# Altium PCB POWR0009.PcbDoc
Units mm, origin at the board's own origin, x right, y up, seen from the top; angles counter-clockwise.
Board outline 50 x 50 mm, 2 copper layers (Top Layer, Bottom Layer); 67 components, 40 nets, 223 pads, 95 vias.
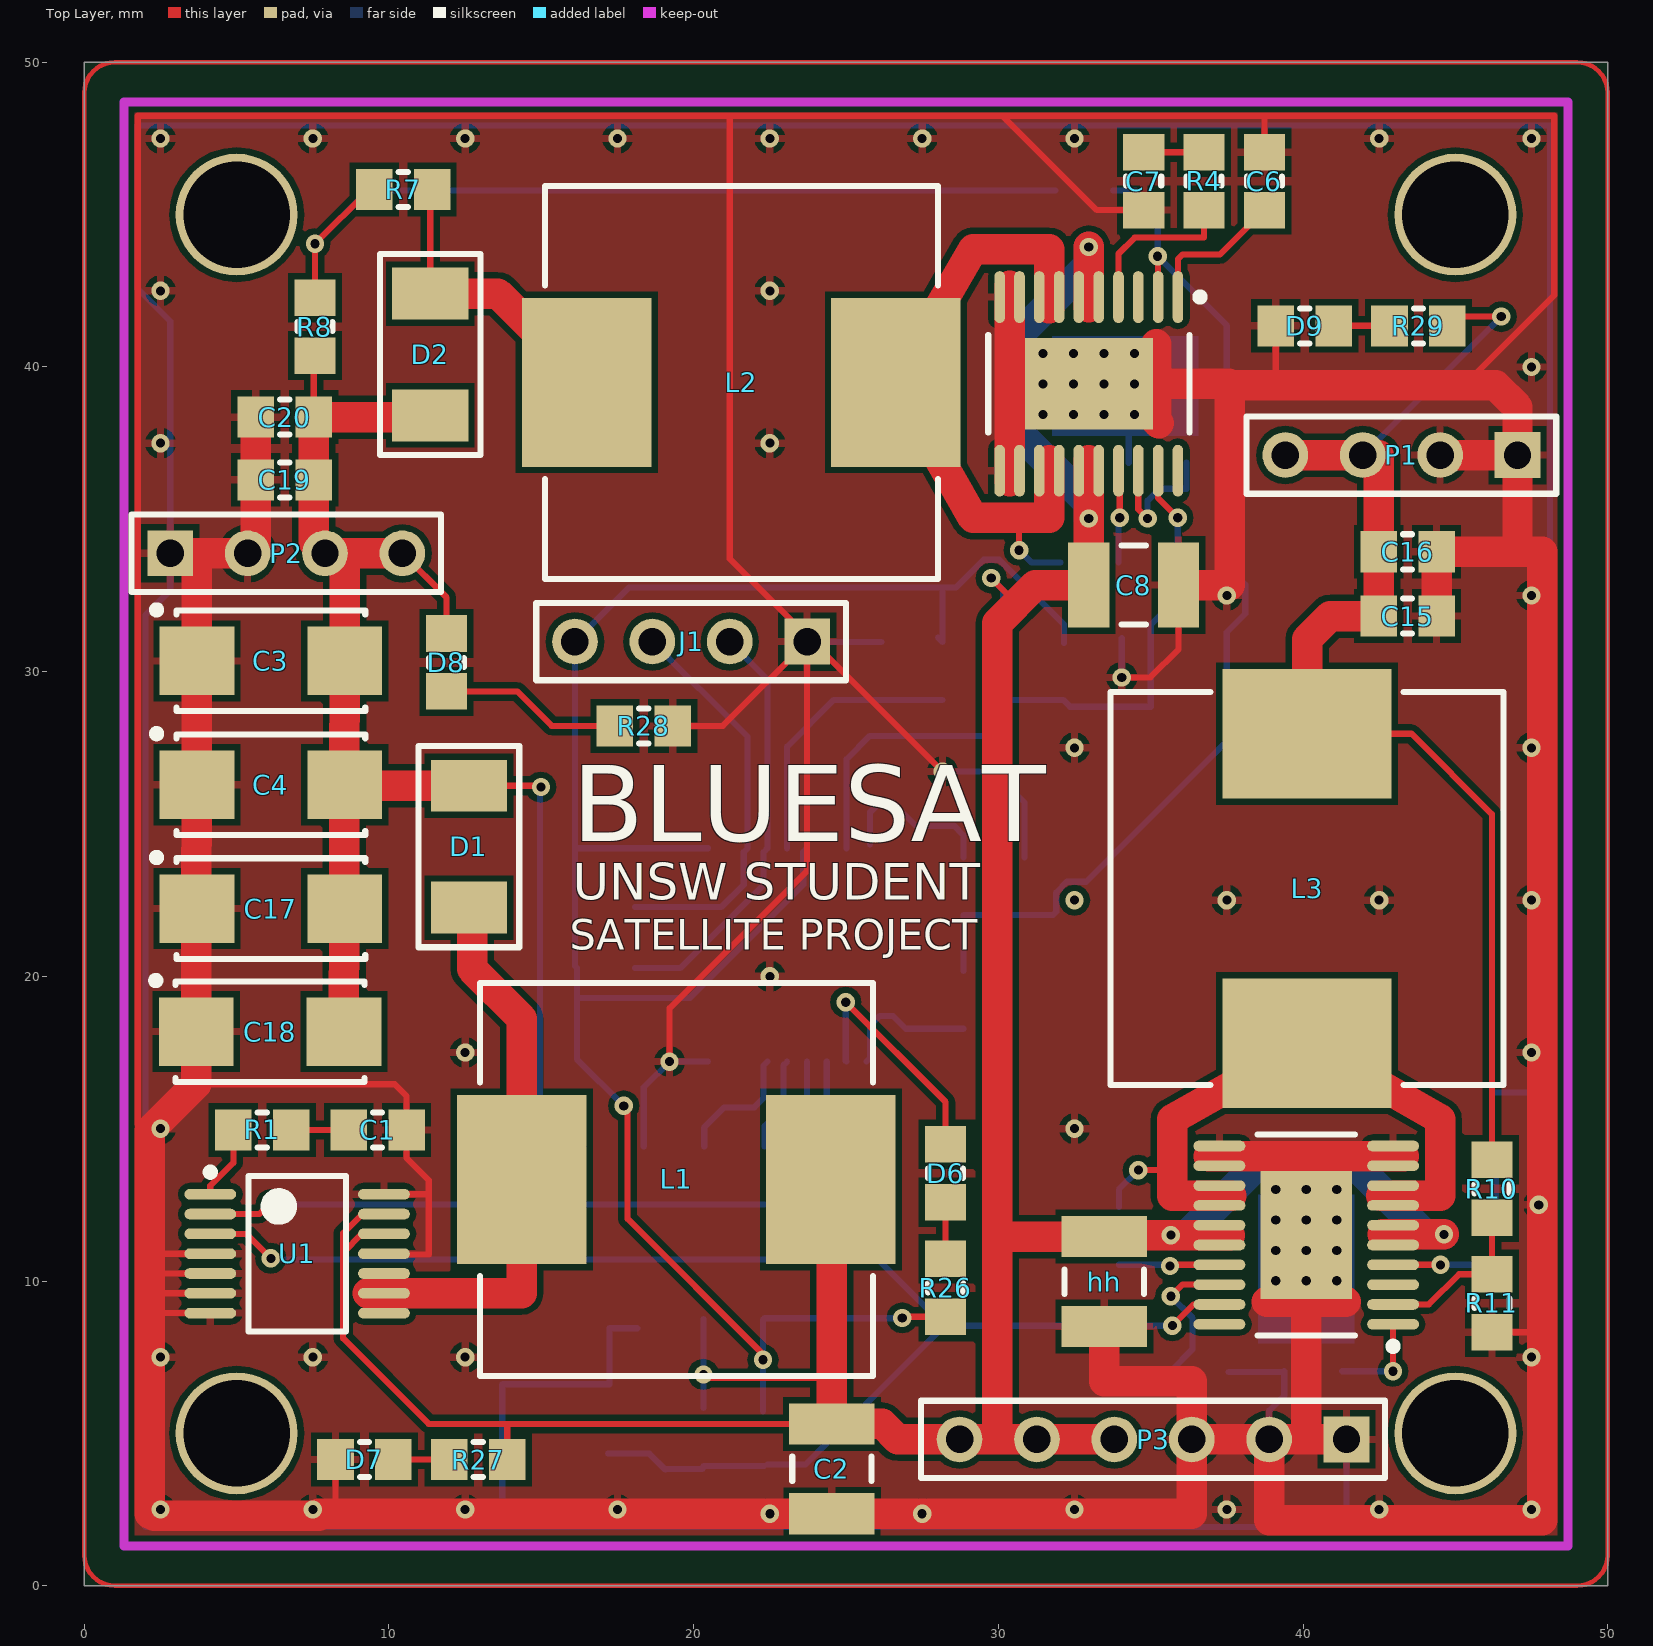
[diagram p0: Top Layer view]
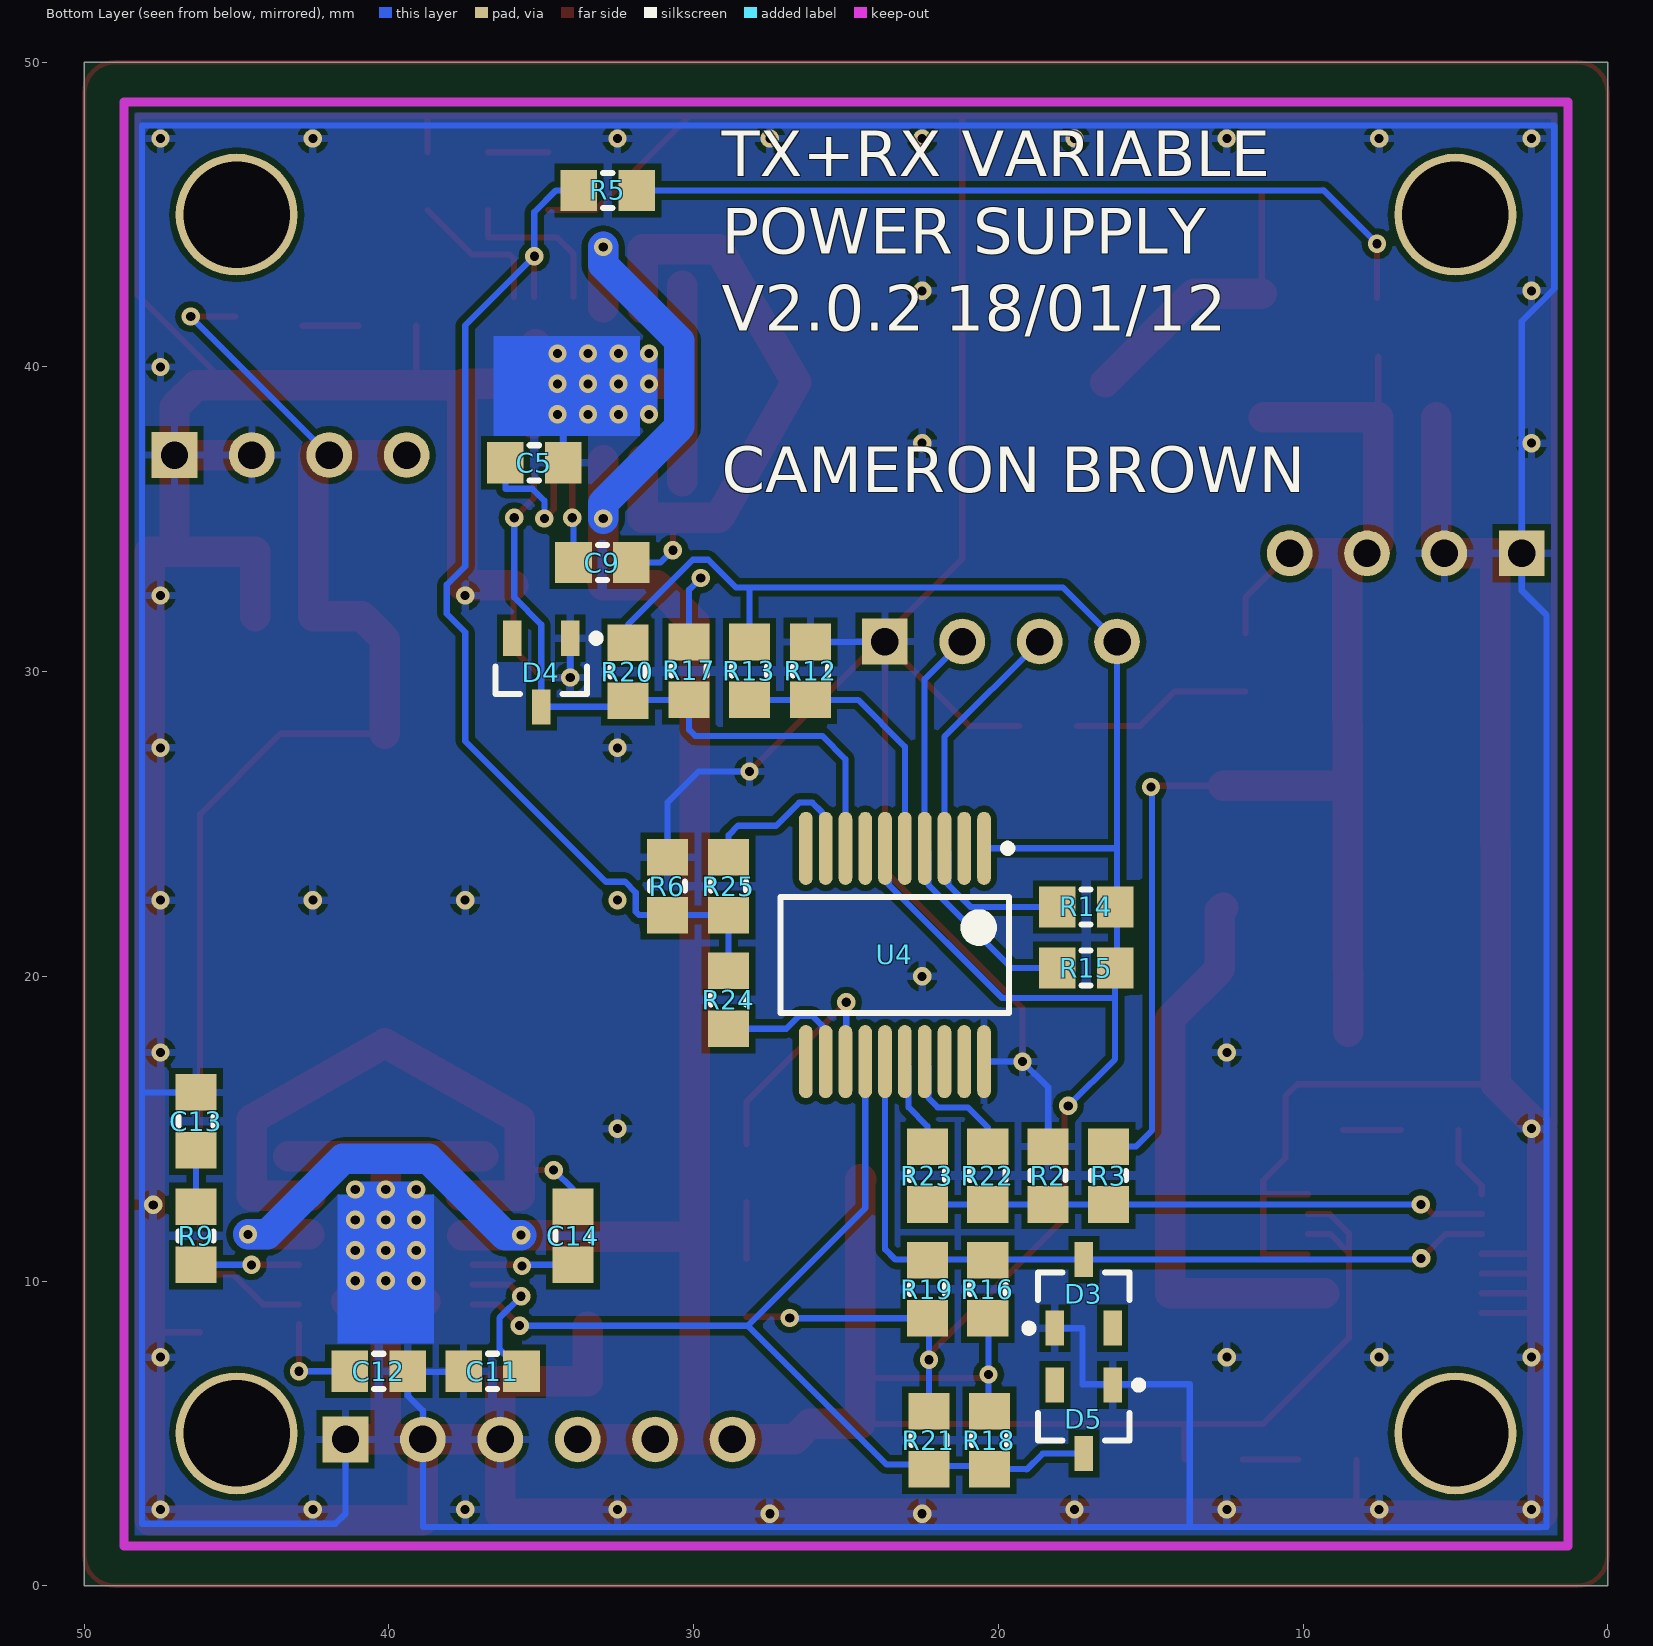
[diagram p1: Bottom Layer view, seen from below]

## Layer stack, top to bottom
Top Layer: signal copper 0.0356
Dielectric: dielectric 0.32, FR-4, Dk 4.8
Bottom Layer: signal copper 0.0356

## Board outline
0,0 50,0 50,50 0,50

## Design rules (kind name [scope] priority, off if disabled: settings)
Clearance [All] p1: gap=0.2
HoleSize [All] p1: absolutevalues=TRUE maxlimit=6.3 minlimit=0.025 maxpercent=80.000 minpercent=20.000
MinimumSolderMaskSliver [All] p1: minsoldermaskwidth=0.1
PolygonConnect [All] p1: connectstyle=Relief reliefconductorwidth=0.254 reliefentries=4 polygonreliefangle="90 Angle"
RoutingVias [All] p1: holewidth=0.3 width=0.6 viastyle="Through Hole" minholewidth=0.3 minwidth=0.6 maxholewidth=0.3 maxwidth=0.6
SilkscreenOverComponentPads [All] p1: minsilkscreentomaskgap=0.254
SolderMaskExpansion [All] p1: expansion=0.102
Width [All] p1: maxlimit=1 minlimit=0.152 preferedwidth=0.203
25 further rules are at their usual default settings.

## Components (designator, comment, footprint, x,y, rotation, side; value= is the part's Value field where it differs from the comment)
C1 "Cap" R0805M 9.627,14.961 r180 top
C2 "C3225X7R1C226M" R1210M 24.536,3.835 r90 top
C3 "TAJC476K020RNJ" TANTCASEC 6.121,30.353 r0 top
C4 "Cap" TANTCASEC 6.121,26.289 r0 top
C5 "Cap" R0805M 35.23,36.855 r0 bottom
C6 "Cap" R0805M 38.735,46.101 r270 top
C7 "Cap" R0805M 34.773,46.101 r90 top
C8 "Cap" R1210M 34.442,32.842 r180 top
C9 "Cap" R0805M 32.995,33.579 r0 bottom
C11 "Cap" R0805M 36.601,7.036 r180 bottom
C12 "Cap" R0805M 40.335,7.036 r0 bottom
C13 "Cap" R0805M 46.33,15.24 r270 bottom
C14 "Cap" R0805M 33.96,11.481 r90 bottom
C15 "Cap" R0805M 43.434,31.826 r180 top
C16 "Cap" R0805M 43.434,33.934 r180 top
C17 "Cap" TANTCASEC 6.121,22.225 r0 top
C18 "Cap" TANTCASEC 6.096,18.186 r0 top
C19 "Cap" R0805M 6.579,36.297 r0 top
C20 "Cap" R0805M 6.579,38.354 r0 top
D1 "B220A-13-F" DIODESMA 12.624,24.257 r90 top
D2 "B220A-13-F" DIODESMA 11.354,40.411 r270 top
D3 "MMBZ5231BLT1G" SOT95P240-3N 17.196,9.576 r90 bottom
D4 "MMBZ5231BLT1G" SOT95P240-3N 35.001,29.972 r270 bottom
D5 "MMBZ5231BLT1G" SOT95P240-3N 17.196,5.461 r270 bottom
D6 "LED2" R0805M 28.27,13.538 r90 top
D7 "LED2" R0805M 9.195,4.14 r180 top
D8 "LED2" R0805M 11.887,30.302 r270 top
D9 "LED2" R0805M 40.056,41.351 r180 top
hh "Cap" R1210M 33.477,9.982 r90 top (schematic designator C10)
J1 "Header 4" HDR1X4 23.724,30.988 r180 top
L1 "SRR1260-100M" SRR1260M 19.431,13.335 r180 top
L2 "SRR1260-150M" SRR1260M 21.565,39.497 r180 top
L3 "SRR1260-150M" SRR1260M 40.132,22.885 r90 top
P1 "Header 4" HDR1X4 47.041,37.109 r180 top
P2 "Header 4" HDR1X4 2.819,33.884 r0 top
P3 "Header 6" HDR1X6 41.427,4.801 r180 top
R1 "Res2" R0805M 5.842,14.961 r180 top
R2 "Res2" R0805M 18.364,13.462 r270 bottom
R3 "Res2" R0805M 16.383,13.462 r90 bottom
R4 "Res2" R0805M 36.754,46.101 r90 top
R5 "Res2" R0805M 32.817,45.796 r0 bottom
R6 "Res2" R0805M 30.861,22.962 r90 bottom
R7 "Res2" R0805M 10.465,45.822 r180 top
R8 "Res2" R0805M 7.569,41.326 r90 top
R9 "Res2" R0805M 46.33,11.481 r90 bottom
R10 "Res2" R0805M 46.203,13.03 r90 top
R11 "Res2" R0805M 46.203,9.271 r90 top
R12 "Res2" R0805M 26.162,30.023 r270 bottom
R13 "Res2" R0805M 28.169,30.023 r90 bottom
R14 "Res2" R0805M 17.12,22.276 r180 bottom
R15 "Res2" R0805M 17.12,20.269 r180 bottom
R16 "Res2" R0805M 20.345,9.728 r270 bottom
R17 "Res2" R0805M 30.15,30.023 r90 bottom
R18 "Res2" R0805M 20.295,4.775 r90 bottom
R19 "Res2" R0805M 22.327,9.728 r270 bottom
R20 "Res2" R0805M 32.156,29.997 r90 bottom
R21 "Res2" R0805M 22.276,4.775 r90 bottom
R22 "Res2" R0805M 20.345,13.462 r270 bottom
R23 "Res2" R0805M 22.327,13.462 r270 bottom
R24 "Res2" R0805M 28.854,19.228 r90 bottom
R25 "Res2" R0805M 28.854,22.962 r270 bottom
R26 "Res2" R0805M 28.27,9.779 r270 top
R27 "Res2" R0805M 12.929,4.14 r0 top
R28 "Res2" R0805M 18.364,28.219 r180 top
R29 "Res2" R0805M 43.79,41.351 r0 top
U1 "LM2700MT-ADJ" MTC14_N 6.985,10.897 r0 top
U4 "MCP23009SS" SSOP-SS20_M 23.393,20.701 r270 bottom

## Footprints (in the part's own frame and the unit in brackets; to place one, negate y for a bottom-side part, rotate by r counter-clockwise, add the part's x,y. Pads: shape width x height; smd on the part's side, far side on the other; paste and mask are expansions set on the pad)
DIODESMA [mm]
  rect 1.7x2.5 smd: 1(-2,0) 2(2,0)
  silkscreen extent -3.3,-1.65 3.3,1.65
HDR1X4 [mm] "Connector; Header; 4 Position"
  rect 1.5x1.5 hole 0.9: 1(0,0)
  round 1.5 hole 0.9: 2(2.54,0) 3(5.08,0) 4(7.62,0)
  silkscreen extent -1.27,-1.27 8.89,1.27
HDR1X6 [mm] "Connector; Header; 6 Position"
  rect 1.5x1.5 hole 0.9: 1(0,0)
  round 1.5 hole 0.9: 2(2.54,0) 3(5.08,0) 4(7.62,0) 5(10.16,0) 6(12.7,0)
  silkscreen extent -1.27,-1.27 13.97,1.27
MTC14_N [mm] "TSOP, 14-Leads, Body 5x4.4mm, Pitch 0.65mm, IPC Medium Density"
  oval 1.7x0.35 smd: 1(-2.85,1.95) 2(-2.85,1.3) 3(-2.85,0.65) 4(-2.85,0) 5(-2.85,-0.65) 6(-2.85,-1.3) 7(-2.85,-1.95) 8(2.85,-1.95) 9(2.85,-1.3) 10(2.85,-0.65) 11(2.85,0) 12(2.85,0.65) 13(2.85,1.3) 14(2.85,1.95)
  silkscreen extent -2.97,-2.55 1.6,2.8, body extent -2.25,-2.55 2.25,2.55, height 1.1
R0805M [mm] "Chip Resistor, 2-Leads, Body 2.0x1.3mm, IPC Medium Density"
  rect 1.2x1.35 smd: 1(-0.95,0) 2(0.95,0)
  silkscreen extent -0.15,-0.58 0.15,0.58, body extent -1.1,-0.67 1.1,0.67, height 0.6
R1210M [mm] "Chip Capacitor, 2-Leads, Body 3.2x2.5mm, IPC Medium Density"
  rect 1.35x2.8 smd: 1(-1.475,0) 2(1.475,0)
  silkscreen extent -0.4,-1.3 0.4,1.3, body extent -1.75,-1.4 1.75,1.4, height 1.5
SOT95P240-3N [mm] "SOT23, 3-Leads, Body 2.9x1.3mm, Pitch 0.95mm, Lead Span 2.4mm, IPC Medium Density"
  rect 1.15x0.6 smd: 1(-1.125,0.95) 2(-1.125,-0.95) 3(1.125,0)
  silkscreen extent -1.25,-1.5 0.7,1.93, body extent -0.7,-1.5 0.7,1.5, height 1.14
SRR1260M [mm]
  rect 4.25x5.55 smd: 1(-5.075,0) 2(5.075,0)
  silkscreen extent -6.45,-6.45 6.45,6.45, body extent -6.4,-6.4 6.4,6.4, height 6
SSOP-SS20_M [mm] "SOP, 20-Leads, Body 7.2x5.2mm, Pitch 0.65mm, IPC Low Density"
  oval 2.4x0.45 smd: 1(-3.5,2.925) 2(-3.5,2.275) 3(-3.5,1.625) 4(-3.5,0.975) 5(-3.5,0.325) 6(-3.5,-0.325) 7(-3.5,-0.975) 8(-3.5,-1.625) 9(-3.5,-2.275) 10(-3.5,-2.925) 11(3.5,-2.925) 12(3.5,-2.275) 13(3.5,-1.625) 14(3.5,-0.975) 15(3.5,-0.325) 16(3.5,0.325) 17(3.5,0.975) 18(3.5,1.625) 19(3.5,2.275) 20(3.5,2.925)
  silkscreen extent -3.62,-3.75 1.9,3.82, body extent -2.7,-3.75 2.7,3.75, height 2
TANTCASEC [mm] "Molded Capacitor, 2-Leads, Body 6.1x3.3mm, IPC Medium Density"
  rect 2.45x2.25 smd: 1(-2.425,0) 2(2.425,0)
  silkscreen extent -3.87,-1.65 3.1,1.8, body extent -3.1,-1.65 3.1,1.65, height 2.6

## Part data
C1 C4 C5 C6 C7 C8 C9 C11 C12 C13 C14 C15 C16 C17 C18 C19 C20 hh: "Capacitor"
C2 C3: library part Cap, "Capacitor"
D1 D2: library part "Diode 1N4148", "High Conductance Fast Diode"
D3 D4 D5: library part "Diode BAS16", "Silicon Switching Diode for High-Speed Switching"
D6 D7 D8 D9: "Typical RED, GREEN, YELLOW, AMBER GaAs LED"
J1 P1 P2: "Header, 4-Pin"
L1 L2 L3: library part Inductor, "Inductor"
P3: "Header, 6-Pin"
R1 R2 R3 R4 R5 R6 R7 R8 R9 R10 R11 R12 R13 R14 R15 R16 R17 R18 R19 R20 R21 R22 R23 R24 R25 R26 R27 R28 R29: "Resistor"
U1: "600kHz/1.25MHz, 2.5A, Step-up PWM DC/DC Converter"

## Free pads (board coordinates)
  round 4 hole 3.5: 1(5,45) 2(45,45) 3(5,5) 4(45,5)
  oval 0.35x1.7 smd: 1(35.894,42.296) 2(35.244,42.296) 3(34.594,42.296) 4(33.944,42.296) 5(33.294,42.296) 6(32.644,42.296) 7(31.994,42.296) 8(31.344,42.296) 9(30.694,42.296) 10(30.044,42.296) 11(30.044,36.596) 12(30.694,36.596) 13(31.344,36.596) 14(31.994,36.596) 15(32.644,36.596) 16(33.294,36.596) 17(33.944,36.596) 18(34.594,36.596) 19(35.244,36.596) 20(35.894,36.596)
  oval 1.7x0.35 smd: 1(42.957,8.581) 2(42.957,9.231) 3(42.957,9.881) 4(42.957,10.531) 5(42.957,11.181) 6(42.957,11.831) 7(42.957,12.481) 8(42.957,13.131) 9(42.957,13.781) 10(42.957,14.431) 11(37.257,14.431) 12(37.257,13.781) 13(37.257,13.131) 14(37.257,12.481) 15(37.257,11.831) 16(37.257,11.181) 17(37.257,10.531) 18(37.257,9.881) 19(37.257,9.231) 20(37.257,8.581)
  rect 4.2x3 smd: 21(32.969,39.446)
  rect 3x4.2 smd: 21(40.107,11.506)

## Via types
v1: diameter 0.6, hole 0.3, Top Layer to Bottom Layer, 71 vias
v2: diameter 0.6, hole 0.3, Top Layer to Bottom Layer, tented top, 24 vias

## Nets (pads, with @x,y where several pads share a name; then routed paths per layer and width w, separated by ;. In a path a pad name is that pad's centre, name@x,y a point inside that pad or via, vN(x,y) a via of type N, cw(c..) or ccw(c..) an arc to the next point about the centre after c; other vN are vias at no path point)
ADDR: R12.2 R13.1 U4.5 | length 9.1
  Bottom Layer w0.203: U4.5 23.068,27.539 24.602,29.073 R12.2 R13.1
BO_0: R23.1 U4.16 | length 3.1
  Bottom Layer w0.203: R23.1 22.327,15.081 22.945,15.699 22.945,17.078 U4.16
BO_1: R22.1 U4.17 | length 4.2
  Bottom Layer w0.203: R22.1 20.345,15.039 21.006,15.699 21.987,15.699 22.295,16.008 22.295,17.078 U4.17
BU_0: R25.1 U4.9 | length 5.4
  Bottom Layer w0.203: U4.9@25.792,24.324 25.792,25.394 26.1,25.703 26.537,25.703 27.296,24.943 28.55,24.943 28.854,24.638 R25.1
BU_1: R24.1 U4.12 | length 4.6
  Bottom Layer w0.203: U4.12 25.792,17.324 25.792,18.394 26.1,18.703 26.537,18.703 26.961,18.278 R24.1
GND: C1.1 C2.1 C3.1 C4.1 C5.1 C6.1 C7.1 C8.1 C11.1 C12.1 C13.1 C15.1 C16.1 C17.1 C18.1 C19.1 C20.1 D3.1 D4.1 D5.1 D7.2 D9.2 hh.1 J1.1 P1.1 P1.2 P2.1 P2.2 P3.1 P3.2 P3.3 pad.9 pad.10 pad.11 pad.12 pad.21 R2.1 R6.2 R11.1 R12.1 R28.1 U1.4 U1.5 U1.6 U1.7 U1.11 U1.14 U4.20 | length 586.5
  Top Layer w0.203: 1.752,15.138 1.752,48.248 30.136,48.248 ; 2.156,8.947 U1.7 ; 2.16,10.247 U1.5 ; 2.175,10.897 U1.4 ; 2.222,9.597 U1.6 ; 3.671,16.456 10.188,16.456 10.577,16.068 C1.1 10.577,14.036 11.303,13.31 11.303,10.871 U1.11@9.86,10.871 ; 8.245,2.401 D7.2 ; U1.14 11.297,12.847 ; v1(19.208,17.201) 19.208,18.954 23.724,23.47 J1.1 20.955,28.219 R28.1 ; 21.184,48.172 21.184,33.706 v1(28.169,26.721) ; 31.013,48.248 30.136,48.248 ; v1(34.051,29.809) 34.991,29.809 35.917,30.736 C8.1 ; C7.1 33.233,45.151 30.136,48.248 ; C6.1 38.735,48.248 ; 39.106,39.487 D9.2 ; 45.288,39.395 48.248,42.356 48.248,48.248 38.735,48.248 ; R11.1 47.708,8.321 ; 30.136,48.248 38.735,48.248
  Top Layer w1: P2.1 P2.2 ; 3.696,33.668 C3.1 3.688,26.289 3.679,22.225 C18.1 3.671,16.456 2.15,14.935 2.15,4 2.15,2.36 2.3,2.36 2.3,2.3 7.7,2.3 7.7,2.36 C2.1 36.347,2.36 P3.3 ; P2.2@5.629,34.153 C19.1 C20.1 ; 30.378,36.246 30.378,39.446 ; 30.378,42.672 30.378,39.446 ; v2(31.469,39.446) 30.378,39.446 ; hh.1 33.477,6.706 36.347,6.706 P3.3 ; v2(34.469,39.446) 35.179,39.446 ; 35.179,40.746 35.179,39.446 ; 35.269,38.146 35.179,38.236 35.179,39.446 ; C8.1 37.592,32.842 37.592,39.395 45.288,39.395 46.33,39.395 47.041,38.684 P1.1 ; 36.906,14.097 40.107,14.097 ; 37.567,39.446 35.179,39.446 ; 38.811,9.322 40.107,9.322 ; v2(40.107,10.006) 40.107,9.322 ; v2(40.107,12.006) v2(40.107,13.006) 40.107,14.097 ; 41.407,9.322 40.107,9.322 ; P3.1 40.107,4.801 ; 43.307,14.097 40.107,14.097 ; C15.1 C16.1 47.041,33.934 ; P1.2 P1.1 ; P3.3 P3.2 ; P3.2 38.887,2.15 47.85,2.15 47.85,33.934 47.041,33.934 ; P3.2 40.107,4.801 ; 40.107,4.801 40.107,9.322 ; 47.041,33.934 P1.1
  Bottom Layer w0.203: 13.716,2.007 13.716,6.604 13.723,6.611 17.239,6.611 17.239,8.451 D3.1 ; R2.1 18.364,16.358 v1(19.208,17.201) U4.20 ; J1.1@23.739,30.973 R12.1 ; v1(28.169,26.721) 29.845,26.721 30.861,25.705 R6.2 ; v1(34.051,29.809) D4.1 ; C5.1 34.28,37.785 34.469,37.974 v2(34.469,38.446) ; C11.1@37.551,7.01 C12.1@39.385,7.01 ; C12.1 C12.1@39.385,7.01 ; P3.1 41.427,2.362 41.758,2.032 48.108,2.032 48.108,47.93 1.753,47.93 1.753,42.57 2.819,41.504 P2.1 2.819,32.664 2.007,31.852 2.007,1.93 38.887,1.93 P3.2 38.887,5.74 39.385,6.238 C12.1@39.385,7.01 ; C13.1 48.092,16.19
  other v1: 22.5,2.36 27.5,2.36 2.5,2.5 7.5,2.5 12.5,2.5 17.5,2.5 32.5,2.5 37.5,2.5 42.5,2.5 47.5,2.5 2.5,7.5 7.5,7.5 12.5,7.5 47.5,7.5 47.74,12.5 2.5,15 32.5,15 12.5,17.5 47.5,17.5 22.5,20 37.5,22.5 42.5,22.5 47.5,22.5 32.5,27.5 47.5,27.5 37.5,32.5 47.5,32.5 2.5,37.5 22.5,37.5 47.5,40 2.5,42.5 22.5,42.5 2.5,47.5 7.5,47.5 12.5,47.5 17.5,47.5 22.5,47.5 27.5,47.5 32.5,47.5 42.5,47.5 47.5,47.5
  other v2: 39.107,10.006 41.107,10.006 39.107,11.006 40.107,11.006 41.107,11.006 39.107,12.006 41.107,12.006 39.107,13.006 41.107,13.006 31.469,38.446 32.469,38.446 33.469,38.446 32.469,39.446 33.469,39.446 31.469,40.446 32.469,40.446 33.469,40.446 34.469,40.446
NetC1_2: C1.2 R1.1 | length 1.9
  Top Layer w0.203: R1.1 C1.2
NetC7_2: C7.2 R4.2 | length 2
  Top Layer w0.203: C7.2 R4.2
NetC13_2: C13.2 R9.2 | length 1.9
  Bottom Layer w0.203: R9.2 C13.2
NetD6_1: D6.1 R26.1 | length 1.9
  Top Layer w0.203: R26.1 D6.1
NetD7_1: D7.1 R27.1 | length 1.8
  Top Layer w0.203: D7.1 R27.1
NetD8_2: D8.2 R28.2 | length 6
  Top Layer w0.203: D8.2 14.209,29.352 15.342,28.219 R28.2
NetD9_1: D9.1 R29.1 | length 1.8
  Top Layer w0.203: D9.1 R29.1
R_BU_BOOT: C14.1 pad.17@37.257,10.531 | length 3.3
  Top Layer w0.203: v1(35.636,10.49) 35.677,10.531 pad.17@37.257,10.531
  Bottom Layer w0.203: C14.1 35.596,10.531 v1(35.636,10.49)
R_BU_COM: pad.4@42.957,10.531 R9.1 | length 3.4
  Top Layer w0.203: pad.4@42.957,10.531 v1(44.516,10.531)
  Bottom Layer w0.203: v1(44.516,10.531) R9.1
R_BU_SS: C12.2 pad.1@42.957,8.581 | length 3.2
  Top Layer w0.203: v1(42.951,7.036) 42.951,7.645 42.957,7.651 pad.1@42.957,8.581
  Bottom Layer w0.203: C12.2 v1(42.951,7.036)
R_BU_SW: C14.2 L3.1 pad.7@42.957,12.481 pad.8@42.957,13.131 pad.13@37.257,13.131 pad.14@37.257,12.481 | length 21.6
  Top Layer w0.203: v1(34.595,13.64) 35.706,13.64
  Top Layer w1: 37.643,12.802 35.706,12.802 35.706,13.64 35.706,15.306 L3.1 44.507,15.306 44.507,12.802 42.57,12.802
  Bottom Layer w0.203: C14.2 33.96,13.005 v1(34.595,13.64)
R_BU_VCC: C11.2 pad.18@37.257,9.881 | length 4.8
  Top Layer w0.203: v1(35.662,9.5) 36.043,9.881 pad.18@37.257,9.881
  Bottom Layer w0.203: C11.2 36.373,7.757 36.373,8.788 v1(35.662,9.5)
RX_BUCK_EN: D5.3 pad.19@37.257,9.231 R18.1 R21.1 U4.14 | length 32.6
  Top Layer w0.203: v1(35.712,8.534) 36.409,9.231 pad.19@37.257,9.231
  Bottom Layer w0.203: D5.3 18.549,4.336 19.075,3.81 ; 19.091,3.825 R18.1 ; R18.1@20.32,3.927 R21.1@22.301,3.927 ; R21.1@22.428,3.978 23.673,3.978 28.23,8.534 ; U4.14 24.368,12.396 28.23,8.534 ; v1(35.712,8.534) 28.23,8.534
RX_BUCK_FB: pad.2@42.957,9.231 R10.1 R11.2 | length 5.5
  Top Layer w0.203: pad.2@42.957,9.231 44.131,9.231 45.121,10.221 R11.2 R10.1
RX_V_OUT: C15.2 C16.2 L3.2 P1.3 P1.4 R10.2 R29.2 | length 40
  Top Layer w0.203: L3.2 43.566,27.96 46.203,25.324 R10.2 ; R29.2@45.044,41.656 v1(46.507,41.656)
  Top Layer w1: P1.4 P1.3 ; L3.2 40.132,31.064 40.894,31.826 C15.2 C16.2 P1.3@42.484,37.109
  Bottom Layer w0.203: P1.3 v1(46.507,41.656)
SCL: J1.3 R14.1 U4.3 | length 13.2
  Bottom Layer w0.203: R14.1 20.913,22.276 21.645,23.008 21.645,24.078 U4.3 21.768,27.863 J1.3
SDA: J1.2 R15.1 U4.4 | length 13.9
  Bottom Layer w0.203: R15.1 19.556,20.269 22.295,23.008 22.295,24.078 U4.4 22.418,29.753 J1.2
STATUS_LED: D6.2 U4.13 | length 8
  Top Layer w0.203: v1(24.994,19.152) 28.27,15.875 D6.2
  Bottom Layer w0.203: v1(24.994,19.152) 24.994,17.226 U4.13
T_BO_COMP: R1.2 U1.1 | length 2.4
  Top Layer w0.203: U1.1 4.135,13.127 4.892,13.884 R1.2
T_BO_SW: D1.1 L1.2 U1.8 U1.9 U1.10 | length 18.4
  Top Layer w1: U1.9@9.296,9.597 U1.9 14.356,9.597 L1.2 14.356,18.613 12.725,20.244 12.725,22.155 D1.1
T_BU_BOOT: C9.2 pad.17@33.944,36.596 | length 3
  Top Layer w0.203: v1(33.985,35.052) pad.17@33.985,36.555
  Bottom Layer w0.203: C9.2 33.945,35.011 v1(33.985,35.052)
T_BU_COM: pad.4@33.944,42.296 R4.1 | length 5.4
  Top Layer w0.203: pad.4@33.944,42.296 33.944,43.723 34.47,44.249 36.754,44.249 R4.1
T_BU_OS: R5.1 R7.2 R8.2 | length 29.3
  Top Layer w0.203: R8.2 v1(7.569,44.044) R7.2@9.347,45.822
  Bottom Layer w0.203: v1(7.569,44.044) 9.322,45.796 R5.1
T_BU_SS: C6.2 pad.1@35.894,42.296 | length 4.8
  Top Layer w0.203: pad.1@35.894,42.296 35.894,43.543 36.043,43.691 37.275,43.691 C6.2
T_BU_SW: C9.1 L2.1 pad.7@31.994,42.296 pad.8@31.344,42.296 pad.13@31.344,36.596 pad.14@31.994,36.596 | length 21.6
  Top Layer w0.203: v1(30.683,33.985) 30.683,35.046
  Top Layer w1: 31.674,36.932 31.674,35.046 30.683,35.046 29.169,35.046 L2.1 29.169,43.872 31.674,43.872 31.674,41.935
  Bottom Layer w0.203: v1(30.683,33.985) 31.09,33.579 C9.1
T_BU_VCC: C5.2 pad.18@34.594,36.596 | length 4.6
  Top Layer w0.203: pad.18@34.594,36.596 34.594,35.332 v1(34.9,35.027)
  Bottom Layer w0.203: v1(34.9,35.027) 34.9,35.611 35.291,36.002 36.18,36.002 C5.2
T_BU_VO: D2.1 L2.2 R7.1 | length 9.7
  Top Layer w0.203: D2.1 R7.1@11.354,45.761
  Top Layer w1: D2.1 13.575,42.411 L2.2
TX_BOOST_EN: D3.3 R16.1 R19.1 U1.3 U4.15 | length 26.2
  Top Layer w0.203: U1.3 5.319,11.547 v1(6.121,10.744)
  Bottom Layer w0.203: v1(6.121,10.744) 6.165,10.701 17.526,10.701 23.375,10.701 23.718,11.044 U4.15
TX_BOOST_FB: R2.2 R3.1 R22.2 R23.2 U1.2 | length 18.4
  Top Layer w0.203: U1.2 5.745,12.197 6.096,12.548 v1(6.132,12.512)
  Bottom Layer w0.203: v1(6.132,12.512) R3.1 R23.2
TX_BUCK_EN: D4.3 pad.19@35.244,36.596 R17.1 R20.1 U4.8 | length 22.8
  Top Layer w0.203: pad.19@35.244,36.596 35.244,35.698 v1(35.89,35.052)
  Bottom Layer w0.203: U4.8 25.018,27.127 25.781,27.889 29.947,27.889 30.15,28.092 R17.1 32.131,29.073 32.357,28.847 D4.3 35.001,31.547 35.89,32.436 v1(35.89,35.052)
TX_BUCK_FB: pad.2@35.244,42.296 R5.2 R6.1 R24.2 R25.2 | length 35.1
  Top Layer w0.203: pad.2@35.244,42.296 v1@35.244,43.623
  Bottom Layer w0.203: R24.2 R25.2 31.791,22.012 31.898,22.119 31.898,22.749 32.251,23.102 32.881,23.102 37.5,27.721 37.5,31.297 38.102,31.898 38.102,32.858 37.5,33.46 37.5,41.367 v1(35.23,43.637) 35.23,45.085 34.519,45.796 R5.2
TX_V_OUT: C3.2 C4.2 C17.2 C18.2 C19.2 C20.2 D1.2 D2.2 D8.1 P2.3 P2.4 R3.2 R8.1 | length 50.5
  Top Layer w0.203: C20.2 R8.1@7.529,40.335 ; P2.4 11.887,32.436 D8.1 ; D1.2 14.942,26.257 v1(14.986,26.213)
  Top Layer w1: P2.3@7.529,34.254 C19.2 C20.2 D2.2@11.296,38.354 ; P2.3 P2.4 ; C18.2 8.529,22.225 8.538,26.257 8.538,26.289 C3.2 P2.3@8.546,33.718 ; C4.2@8.578,26.257 D1.2
  Bottom Layer w0.203: v1(14.986,26.213) 14.961,26.187 14.961,14.935 15.484,14.412 R3.2
V_IN: C2.2 C8.2 hh.2 L1.1 P3.4 P3.5 P3.6 pad.5 pad.6 pad.15 pad.16 R16.2 R17.2 R18.2 R27.2 U1.12 U1.13 | length 121.7
  Top Layer w0.203: U1.12 9.108,11.547 8.495,10.933 ; U1.13 9.123,12.197 8.495,11.568 8.495,10.933 ; R27.2 13.879,5.295 ; v1(20.32,6.934) 20.439,6.815 24.367,6.815 24.486,6.934 ; C2.2 11.301,5.31 8.495,8.117 8.495,10.933 ; v1(29.769,33.071) 30.591,32.248
  Top Layer w1: L1.1 24.536,13.335 C2.2 26.186,5.31 26.695,4.801 P3.6 29.972,4.801 ; 32.967,36.932 v1(32.967,35.027) C8.2@32.967,33.02 ; 32.969,41.961 v1(32.969,43.942) ; C8.2@33.044,33.096 C8.2@32.967,33.02 ; P3.4 P3.5 29.972,4.801 ; 37.592,11.506 v1(35.662,11.506) hh.2@33.526,11.506 ; 42.621,11.532 v1(44.628,11.532) ; 29.972,4.801 29.972,11.457 ; 29.972,11.457 hh.2 ; 29.972,11.457 29.972,31.598 31.217,32.842 C8.2 C8.2@32.967,33.02 ; hh.2 cw(c33.526,11.457) hh.2@33.526,11.506 ; hh.2 cw(c33.526,11.457) hh.2@33.526,11.506 ; hh.2 cw(c33.526,11.457) hh.2@33.526,11.506 ; hh.2 cw(c33.526,11.457) hh.2@33.526,11.506 ; hh.2 cw(c33.526,11.457) hh.2@33.526,11.506 ; hh.2 hh.2@33.526,11.506
  Bottom Layer w0.203: R18.2@20.32,5.827 v1(20.32,6.934) R16.2@20.32,8.753 ; v1(29.769,33.071) 30.15,32.69 R17.2
  Bottom Layer w1: v1(32.967,35.027) 32.967,35.534 30.469,38.032 30.469,40.86 32.969,43.36 v1(32.969,43.942) ; v1(35.662,11.506) 36.192,11.506 38.692,14.006 41.521,14.006 43.995,11.532 v1(44.628,11.532)
VCC: J1.4 R13.2 R14.2 R15.2 R19.2 R20.2 R21.2 R26.2 U4.1 U4.6 | length 70.2
  Top Layer w0.203: v1(17.704,15.748) 17.831,15.621 17.831,12.04 22.276,7.595 v1(22.276,7.417) ; v1(26.848,8.788) 26.888,8.829 R26.2
  Bottom Layer w0.203: R15.2@16.104,20.335 J1.4 17.882,32.766 28.613,32.766 29.52,33.672 30.031,33.672 32.156,31.547 R20.2 ; 16.109,24.201 U4.1 ; R15.2 16.17,19.345 ; v1(17.704,15.748) 16.17,17.282 16.17,19.345 ; R21.2 v1(22.276,7.417) R19.2@22.276,8.727 ; R19.2 26.838,8.778 v1(26.848,8.788) ; U4.6 23.595,24.078 23.595,23.008 19.88,19.293 16.222,19.293 16.17,19.345 ; R13.2@28.016,31.125 R13.2 28.169,32.741
pads on no net: D3.2 D4.2 D5.2 U4.2 U4.7 U4.10 U4.11 U4.18 U4.19
copper on no net: | length 198.3
  Top Layer w0.152: 0,1 ccw(c1,1) 1,0 49,0 ccw(c49,1) 50,1 50,49 ccw(c49,49) 49,50 1,50 ccw(c1,49) 0,49 0,1
  other v1: 32.5,22.5

## Polygon pours and split planes (outlines as drawn)
GND on Bottom Layer "Bottom Layer-No Net 1" (solid, pour order 1000): 1.3,1.3 1.3,48.7 48.7,48.7 48.7,1.3
GND on Top Layer "Bottom Layer-No Net 1" (solid, pour order 1001): 1.3,1.3 48.7,1.3 48.7,48.7 1.3,48.7

## Keep-outs
Keep-Out Layer:
  lines w0.3: 1.3,1.3 48.7,1.3 48.7,48.7 1.3,48.7 1.3,1.3

## Other copper
Bottom Layer:
  rectangle net GND: 31.769,37.73 36.576,41.024
  rectangle net GND: 38.528,7.95 41.685,12.844
  rectangle net GND: 38.989,12.598 41.072,13.259
  rectangle net GND: 31.191,38.456 32.868,40.538

## Silkscreen, mask and mechanical layers (free items; w line width, h text height)
Top Overlay:
  circle w0.25: c42.957,7.856 r0.125
  circle w0.25: c36.619,42.296 r0.125
  lines w0.2: 29.669,37.846 29.669,41.046 ; 36.269,37.846 36.269,41.046 ; 38.507,8.206 41.707,8.206 ; 38.507,14.806 41.707,14.806
  text "BLUESAT" at 16.01,24.43 h2.5
  text "UNSW STUDENT" at 16.03,22.51 h1.2
  text "SATELLITE PROJECT" at 15.93,20.88 h1
Bottom Overlay:
  text "TX+RX VARIABLE" at 29.07,46.26 h1.5
  text "POWER SUPPLY" at 29.07,43.725 h1.5
  text "V2.0.2 18/01/12" at 29.07,41.19 h1.5
  text "CAMERON BROWN" at 29.07,35.89 h1.5
Mechanical 13:
  circle w0.1: c41.457,9.106 r0.5
  circle w0.1: c35.369,40.796 r0.5
  lines w0.1: 29.669,37.196 36.269,37.196 36.269,41.696 29.669,41.696 29.669,37.196 ; 37.857,8.206 37.857,14.806 42.357,14.806 42.357,8.206 37.857,8.206
Mechanical 15:
  lines w0.1: 32.469,39.446 33.469,39.446 ; 32.969,38.946 32.969,39.946 ; 39.607,11.506 40.607,11.506 ; 40.107,11.006 40.107,12.006 ; 29.419,35.496 36.519,35.496 36.519,43.396 29.419,43.396 29.419,35.496 ; 36.157,7.956 36.157,15.056 44.057,15.056 44.057,7.956 36.157,7.956